# Altium PCB PortSwitcher1D.PCBDOC (part 3 of 4)
Units mil, origin at the board's own origin, x right, y up, seen from the top; angles counter-clockwise.
Board outline 6005.03 x 6005.03 mil, 4 copper layers (Top Layer, InternalPlane1, InternalPlane2, Bottom Layer); 153 components, 325 nets, 1175 pads, 173 vias.
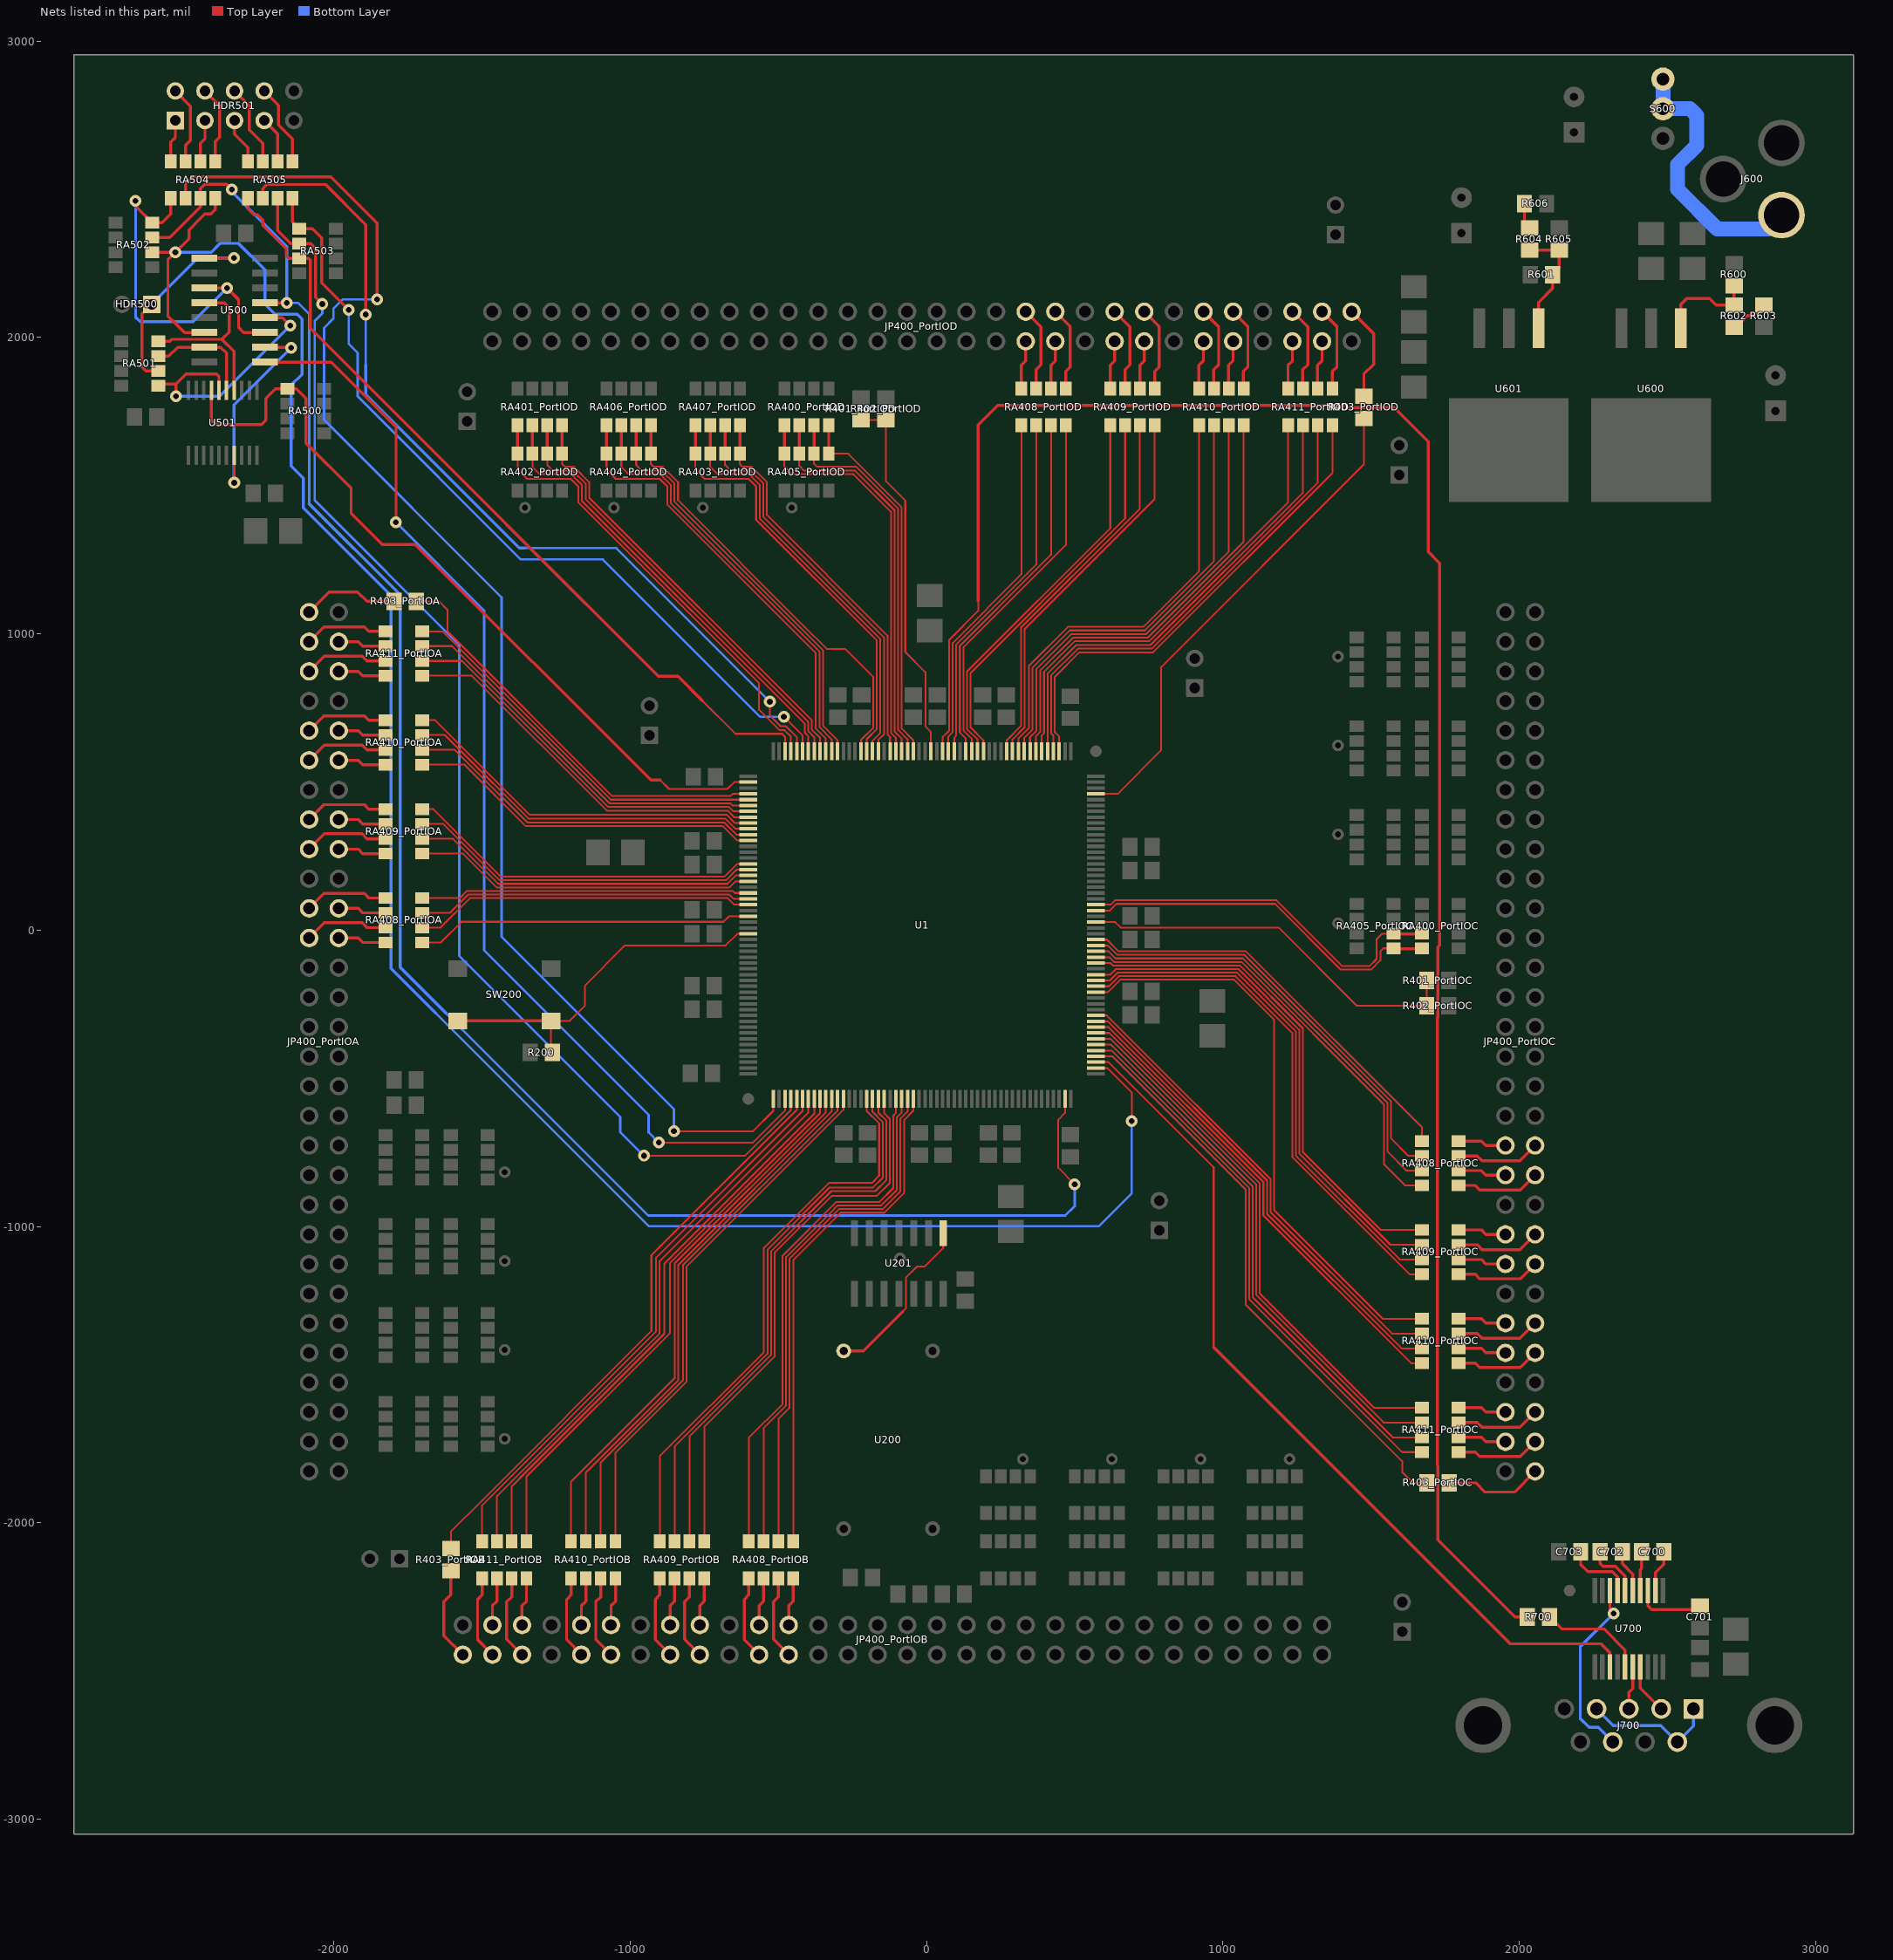
[diagram p5: the nets of this part, all layers, seen from the top]

## Via types
v1: diameter 40, hole 19.68, Top Layer to Bottom Layer, 173 vias

## Nets (pads, with @x,y where several pads share a name; then routed paths per layer and width w, separated by ;. In a path a pad name is that pad's centre, name@x,y a point inside that pad or via, vN(x,y) a via of type N, cw(c..) or ccw(c..) an arc to the next point about the centre after c; other vN are vias at no path point) (continued)
INC14: RA400_PortIOC.7 RA405_PortIOC.6 U1.30 | length 1281.8
  Top Layer w6: U1.30@571.35,86.19 621.14,86.19 635.71,100.77 1180.55,100.77 1401.82,-120.5 1495.13,-120.5 1518.2,-97.43 1518.2,-30.74 1537.53,-11.41 RA405_PortIOC.6@1575.24,-11.41
  Top Layer w10: RA405_PortIOC.6@1574.1,-12.55 RA400_PortIOC.7@1670.1,-12.55
INC15: RA400_PortIOC.8 RA405_PortIOC.5 U1.29 | length 1248.7
  Top Layer w6: U1.29@571.35,66.5 618.42,66.51 640.68,88.77 1175.58,88.77 1397.65,-133.3 1499.3,-133.3 1531,-101.61 1531,-71.09 1540.68,-61.41 RA405_PortIOC.5@1575.24,-61.41
  Top Layer w10: RA405_PortIOC.5@1574.1,-62.55 RA400_PortIOC.8@1670.1,-62.55
INC16: R401_PortIOC.2 R402_PortIOC.1 U1.27 | length 1582.4
  Top Layer w6: U1.27@571.35,27.13 636.49,27.14 654.86,8.77 1187.78,8.77 ; 1374.65,-178.1 1187.78,8.77 ; R401_PortIOC.2@1687.6,-170 R402_PortIOC.1@1687.6,-255 1451.54,-255 1187.78,8.77
IND0: RA401_PortIOD.5 RA402_PortIOD.8 U1.101 | length 1578.3
  Top Layer w6: RA402_PortIOD.8@-1380.26,1607.8 -1380.26,1554.93 -1348.53,1523.2 -1200.63,1523.2 -1175.49,1498.06 -1175.49,1444.01 -565.46,833.98 -565.46,743.67 -496.56,674.77 -479.83,674.77 -458.18,653.12 U1.101@-458.18,603.91
  Top Layer w10: RA402_PortIOD.8@-1380.26,1607.8 RA401_PortIOD.5@-1380.26,1703.8
IND1: RA401_PortIOD.6 RA402_PortIOD.7 U1.98 | length 1547.7
  Top Layer w6: RA402_PortIOD.7@-1330.26,1607.8 -1330.26,1563.99 -1305.04,1538.76 -1199.21,1538.76 -1163.49,1503.04 -1163.49,1448.98 -411.11,696.6 -411.11,666.32 ; -411.11,666.42 -399.12,654.43 U1.98@-399.12,603.91
  Top Layer w10: RA402_PortIOD.7@-1330.26,1607.8 RA401_PortIOD.6@-1330.26,1703.8
IND2: RA401_PortIOD.7 RA402_PortIOD.6 U1.97 | length 1512.1
  Top Layer w6: RA402_PortIOD.6@-1280.26,1607.8 -1280.26,1570.09 -1260.93,1550.76 -1194.24,1550.76 -1150.89,1507.4 -1150.89,1454.09 -399.11,702.32 -399.11,671.42 -379.44,651.75 U1.97@-379.44,603.91
  Top Layer w10: RA402_PortIOD.6@-1280.26,1607.8 RA401_PortIOD.7@-1280.26,1703.8
IND3: RA401_PortIOD.8 RA402_PortIOD.5 U1.96 | length 1478.4
  Top Layer w6: RA402_PortIOD.5@-1230.26,1607.8 -1230.26,1573.24 -1220.58,1563.55 -1190.07,1563.55 -1138.89,1512.37 -1138.89,1459.81 -387.11,708.03 -387.11,676.39 -359.75,649.03 U1.96@-359.75,603.91
  Top Layer w10: RA402_PortIOD.5@-1230.26,1607.8 RA401_PortIOD.8@-1230.26,1703.8
IND4: RA404_PortIOD.8 RA406_PortIOD.5 U1.95 | length 1493.1
  Top Layer w6: RA404_PortIOD.8@-1080.26,1607.8 -1080.26,1554.93 -1048.53,1523.2 -900.63,1523.2 -875.49,1498.06 -875.49,1436.84 -375.11,936.46 -375.11,681.42 -340.07,646.38 U1.95@-340.07,603.91
  Top Layer w10: RA404_PortIOD.8@-1080.26,1607.8 RA406_PortIOD.5@-1080.26,1703.8
IND5: RA404_PortIOD.7 RA406_PortIOD.6 U1.94 | length 1455.9
  Top Layer w6: RA404_PortIOD.7@-1030.26,1607.8 -1030.26,1563.99 -1005.04,1538.76 -899.21,1538.76 -863.49,1503.04 -863.49,1441.82 -361.11,939.43 -361.11,684.42 -320.38,643.69 U1.94@-320.38,603.91
  Top Layer w10: RA404_PortIOD.7@-1030.26,1607.8 RA406_PortIOD.6@-1030.26,1703.8
IND6: RA404_PortIOD.6 RA406_PortIOD.7 U1.93 | length 1420.4
  Top Layer w6: RA404_PortIOD.6@-980.26,1607.8 -980.26,1570.09 -960.93,1550.76 -894.24,1550.76 -850.89,1507.4 -850.89,1446.18 -349.11,944.4 -349.11,689.42 -300.7,641.01 U1.93@-300.7,603.91
  Top Layer w10: RA404_PortIOD.6@-980.26,1607.8 RA406_PortIOD.7@-980.26,1703.8
IND7: RA404_PortIOD.5 RA406_PortIOD.8 U1.89 | length 1482.2
  Top Layer w6: RA404_PortIOD.5@-930.26,1607.8 -930.26,1573.24 -920.58,1563.55 -890.07,1563.55 -838.89,1512.37 -838.89,1451.15 -414.55,1026.82 -337.36,949.62 -275.31,949.62 -180.11,854.42 -180.11,683.4 -221.96,641.55 U1.89@-221.96,603.91
  Top Layer w10: RA404_PortIOD.5@-930.26,1607.8 RA406_PortIOD.8@-930.26,1703.8
IND8: RA403_PortIOD.8 RA407_PortIOD.5 U1.88 | length 1454.2
  Top Layer w6: RA403_PortIOD.8@-780.26,1607.8 -780.26,1554.93 -748.53,1523.2 -600.63,1523.2 -575.49,1498.06 -575.49,1384.61 -168.11,977.22 -168.11,678.43 -202.27,644.26 U1.88@-202.27,603.91
  Top Layer w10: RA403_PortIOD.8@-780.26,1607.8 RA407_PortIOD.5@-780.26,1703.8
IND9: RA403_PortIOD.7 RA407_PortIOD.6 U1.87 | length 1410.7
  Top Layer w6: RA403_PortIOD.7@-730.26,1607.8 -730.26,1563.99 -705.04,1538.76 -599.21,1538.76 -563.49,1503.04 -563.49,1390.09 -156.11,982.7 -156.11,665.51 -182.59,639.03 U1.87@-182.59,603.91
  Top Layer w10: RA403_PortIOD.7@-730.26,1607.8 RA407_PortIOD.6@-730.26,1703.8
IND10: RA403_PortIOD.6 RA407_PortIOD.7 U1.86 | length 1368.8
  Top Layer w6: RA403_PortIOD.6@-680.26,1607.8 -680.26,1570.09 -660.93,1550.76 -594.24,1550.76 -550.89,1507.4 -550.89,1394.45 -144.11,987.67 -144.11,660.54 -162.9,641.74 U1.86@-162.9,603.91
  Top Layer w10: RA403_PortIOD.6@-680.26,1607.8 RA407_PortIOD.7@-680.26,1703.8
IND11: RA403_PortIOD.5 RA407_PortIOD.8 U1.84 | length 1327.7
  Top Layer w6: RA403_PortIOD.5@-630.26,1607.8 -630.26,1573.24 -620.58,1563.55 -590.07,1563.55 -538.89,1512.37 -538.89,1401.15 -132.11,994.37 -132.11,660.54 -123.53,651.96 U1.84@-123.53,603.91
  Top Layer w10: RA403_PortIOD.5@-630.26,1607.8 RA407_PortIOD.8@-630.26,1703.8
IND12: RA400_PortIOD.5 RA405_PortIOD.8 U1.83 | length 1377.2
  Top Layer w6: RA405_PortIOD.8@-480.26,1607.8 -480.26,1564.97 -454.05,1538.76 -246.85,1538.76 -120.11,1412.01 -120.11,665.51 -103.85,649.25 U1.83@-103.85,603.91
  Top Layer w10: RA405_PortIOD.8@-480.26,1607.8 RA400_PortIOD.5@-480.26,1703.8
IND13: RA400_PortIOD.6 RA405_PortIOD.7 U1.82 | length 1344
  Top Layer w6: RA405_PortIOD.7@-430.26,1607.8 -430.26,1567.13 -413.89,1550.76 -241.88,1550.76 -108.11,1416.98 -108.11,670.48 -84.16,646.53 U1.82@-84.16,603.91
  Top Layer w10: RA405_PortIOD.7@-430.26,1607.8 RA400_PortIOD.6@-430.26,1703.8
IND14: RA400_PortIOD.7 RA405_PortIOD.6 U1.81 | length 1308
  Top Layer w6: RA405_PortIOD.6@-380.26,1607.8 -380.26,1574.22 -370.58,1564.54 -238.69,1564.54 -96.11,1421.95 -96.11,675.45 -64.48,643.82 U1.81@-64.48,603.91
  Top Layer w10: RA405_PortIOD.6@-380.26,1607.8 RA400_PortIOD.7@-380.26,1703.8
IND15: RA400_PortIOD.8 RA405_PortIOD.5 U1.80 | length 1256.6
  Top Layer w6: RA405_PortIOD.5@-330.26,1607.8 -264.64,1607.8 -84.11,1427.27 -84.11,680.42 -44.79,641.1 U1.80@-44.79,603.91
  Top Layer w10: RA405_PortIOD.5@-330.26,1607.8 RA400_PortIOD.8@-330.26,1703.8
IND16: R401_PortIOD.2 R402_PortIOD.1 U1.77 | length 1265.5
  Top Layer w6: R401_PortIOD.2@-222.07,1721.73 R402_PortIOD.1@-137.07,1721.73 -137.07,1514.67 -72.11,1449.71 -72.11,938.67 -4.11,870.67 -4.11,687.42 14.26,669.05 U1.77@14.26,603.91
JTAG_NEXUS_TCK: RA503.2 RA505.3 U1.160 | length 4401.5
  Top Layer w6: v1(-954,-761.05) -612.55,-761.05 -458.18,-606.68 U1.160@-458.18,-569.32
  Top Layer w10: RA505.3@-2190.26,2470.29 -2190.26,2361.54 -2146.02,2317.29 -2078.12,2317.29 -2061.98,2301.16 -2061.98,2135.84 v1(-2039.35,2113.21)
  Bottom Layer w8: v1(-2039.35,2113.21) -2039.35,2081.72 -2064.94,2056.14 -2064.94,1450.98 -1576.87,962.92 -1576.87,-87.01 -1033.7,-630.18 -1033.7,-681.35 v1(-954,-761.05)
JTAG_NEXUS_TDI: RA503.3 RA505.1 U1.102 | length 2793.5
  Top Layer w6: -757.2,774.97 -645,662.77 -568.25,662.77 -487.52,662.77 -477.86,653.12 U1.102@-477.86,603.91
  Top Layer w10: RA505.1@-2290.26,2470.29 -2290.26,2434.91 -2269.1,2413.75 -2257.3,2413.75 -2240.26,2396.72 -2240.26,2379.07 -2161.28,2300.08 -2161.28,2276.47 -2152.1,2267.29 -2086.18,2267.29 -2079.7,2260.81 -2079.7,2031.54 -1450.79,1402.63 -1385.85,1337.7 -904.8,856.64 -838.87,856.64 -757.2,774.97
JTAG_NEXUS_TDO: RA505.2 U1.100 | length 3023.3
  Top Layer w6: v1(-529.04,771.23) -529.04,724.97 -492.63,688.55 -474.91,688.55 -438.49,652.13 U1.100@-438.49,603.91
  Top Layer w10: RA505.2@-2240.26,2470.29 -2240.26,2503.18 -2226.79,2516.65 -2028.53,2516.65 -1892.74,2380.86 v1(-1892.74,2077.79)
  Bottom Layer w8: -1892.74,1907.56 v1(-1892.74,2077.79) ; -1355.47,1289.6 -1047.42,1289.6 v1(-529.04,771.23)
  Bottom Layer w10: -1892.74,1907.56 -1892.74,1808.17 -1374.17,1289.6 -1355.47,1289.6
JTAG_NEXUS_TMS: RA503.1 RA505.4 U1.99 | length 2814.2
  Top Layer w6: v1(-481.8,720.05) -419.77,658.02 -419.77,657.12 ; U1.99@-418.81,603.91 -418.81,657.12
  Top Layer w10: RA505.4@-2140.26,2470.29 -2140.26,2390.29 RA503.1@-2117.26,2367.29 -2072.03,2367.29 -2041.32,2336.58 -2041.32,2185.04 v1(-1949.81,2093.53)
  Bottom Layer w8: v1(-1949.81,2093.53) -1949.81,1978.4 -1919.98,1948.58 -1919.98,1801.96 -1369.25,1251.23 -1092.74,1251.23 -561.56,720.05 v1(-481.8,720.05)
NetC700_1: C700.1 U700.2 | length 142.6
  Top Layer w10: U700.2@2459.3,-2228.77 2459.3,-2167.38 2487.14,-2139.55 C700.1@2487.14,-2097.71
NetC700_2: C700.2 U700.4 | length 132.8
  Top Layer w10: U700.4@2408.12,-2228.77 2408.12,-2158.54 2412.33,-2154.33 C700.2@2412.33,-2097.71
NetC701_2: C701.2 U700.3 | length 236.7
  Top Layer w10: U700.3@2433.71,-2228.77 2433.71,-2279.16 2446.7,-2292.16 2597.89,-2292.16 C701.2@2609.74,-2280.31
NetC702_1: C702.1 U700.5 | length 145.7
  Top Layer w10: C702.1@2347.14,-2097.71 2347.14,-2137.49 2382.53,-2172.88 U700.5@2382.53,-2228.77
NetC702_2: C702.2 U700.6 | length 190.9
  Top Layer w10: C702.2@2272.33,-2097.71 2272.33,-2137.47 2282.38,-2147.51 2324.69,-2147.51 2356.94,-2179.76 U700.6@2356.94,-2228.77
NetC703_1: C703.1 U700.7 | length 230.9
  Top Layer w10: C703.1@2207.14,-2097.71 2207.14,-2141.15 2231.21,-2165.22 2313.86,-2165.22 2331.35,-2182.71 U700.7@2331.35,-2228.77
NetHDR500_1: HDR500.1 RA501.2 U500.1 | length 727.9
  Top Layer w10: HDR500.1@-2615.26,2112.29 -2647.46,2080.09 -2647.46,1900.67 -2634.09,1887.29 RA501.2@-2593.26,1887.29 ; U500.1@-2437.63,2267.29 -2338.9,2267.29 v1(-2337.5,2268.68)
  Bottom Layer w10: HDR500.1@-2615.26,2112.29 -2458.87,2268.68 v1(-2337.5,2268.68)
NetJ700_1: J700.1 J700.4 J700.6 | length 453.3
  Bottom Layer w10: J700.4@2260.68,-2627.79 2316.68,-2683.79 2477.51,-2683.79 J700.6@2533.32,-2739.6 2587.85,-2685.07 J700.1@2587.85,-2627.79
NetR600_1: R600.1 R602.2 U600.1 | length 342.3
  Top Layer w10: U600.1@2544.74,2032.29 2544.74,2111.86 2564.78,2131.91 2641.54,2131.91 2663.75,2109.69 R602.2@2724.74,2109.69 R600.1@2724.74,2174.89
NetR601_1: R601.1 R604.2 R605.2 U601.1 | length 391.6
  Top Layer w10: R604.2@2034.74,2294.89 R605.2@2134.74,2294.89 2134.74,2234.89 R601.1@2112.14,2212.29 2112.14,2166.34 2064.74,2118.94 U601.1@2064.74,2032.29
NetR602_1: R602.1 R603.2 | length 131
  Top Layer w10: R602.1@2724.74,2034.89 2729.51,2034.89 2769.46,2074.84 2789.88,2074.84 R603.2@2824.74,2109.69
NetR604_1: R604.1 R606.2 | length 89.8
  Top Layer w10: R606.2@2017.33,2452.29 2017.33,2387.1 R604.1@2034.74,2369.69
NetR700_1: R700.1 U700.15 | length 358.4
  Top Layer w10: R700.1@2102.14,-2317.71 2142.51,-2358.08 2285.83,-2358.08 2356.94,-2429.19 U700.15@2356.94,-2486.65
NetRA501_1: RA501.1 U500.12 U501.6 | length 893.6
  Top Layer w10: RA501.1@-2593.26,1837.29 -2587.76,1842.79 -2533.32,1842.79 ; v1(-2533.32,1802.27) -2533.32,1842.79 ; U501.6@-2388.06,1821.54 -2388.06,1868.57 -2396.54,1877.05 -2499.06,1877.05 -2533.32,1842.79 ; U500.12@-2232.9,2067.29 -2174.49,2067.29 v1(-2147.59,2040.4)
  Bottom Layer w10: v1(-2533.32,1802.27) -2385.72,1802.27 v1(-2147.59,2040.4)
NetRA501_3: RA501.3 U500.7 U501.5 | length 377.2
  Top Layer w10: RA501.3@-2593.26,1937.29 -2557.7,1937.29 -2527.7,1967.29 -2382.48,1967.29 -2362.47,1947.28 U501.5@-2362.47,1821.54
NetRA501_4: RA501.4 U500.4 U501.4 | length 615.7
  Top Layer w10: RA501.4@-2593.26,1987.29 -2553.98,1987.29 -2547.13,1994.15 -2377.85,1994.15 ; U500.4@-2437.63,2117.29 -2370.12,2117.29 -2353.25,2100.42 -2353.25,2018.75 -2377.85,1994.15 ; U501.4@-2336.88,1821.54 -2336.88,1953.18 -2377.85,1994.15
NetU200_8: U200.8 U201.1 | length 591.3
  Top Layer w6: -81.1,-1287.72 -70.38,-1277 -70.38,-1172.67 -32.98,-1135.27 -7,-1135.27 56,-1072.28 U201.1@56,-1022.08
  Top Layer w10: U200.8@-280,-1420 -213.38,-1420 -81.1,-1287.72
O0_PortIOA: JP400_PortIOA.38 RA408_PortIOA.4 | length 164.2
  Top Layer w10: JP400_PortIOA.38@-1983.77,-26.41 -1918.02,-26.41 -1903.02,-41.41 RA408_PortIOA.4@-1825.77,-41.41
O0_PortIOB: JP400_PortIOB.38 RA408_PortIOB.4 | length 164.2
  Top Layer w10: JP400_PortIOB.38@-465.26,-2344.91 -465.26,-2279.17 -450.26,-2264.17 RA408_PortIOB.4@-450.26,-2186.91
O0_PortIOC: JP400_PortIOC.38 RA408_PortIOC.4 | length 164.2
  Top Layer w10: RA408_PortIOC.4@1795.24,-711.41 1872.49,-711.41 1887.49,-726.41 JP400_PortIOC.38@1953.24,-726.41
O0_PortIOD: JP400_PortIOD.38 RA408_PortIOD.4 | length 164.2
  Top Layer w10: RA408_PortIOD.4@319.34,1829.37 319.34,1906.62 334.34,1921.62 JP400_PortIOD.38@334.34,1987.37
O1_PortIOA: JP400_PortIOA.37 RA408_PortIOA.3 | length 286.2
  Top Layer w10: JP400_PortIOA.37@-2083.77,-26.41 -2032.19,25.17 -1905.03,25.17 -1888.45,8.59 RA408_PortIOA.3@-1825.77,8.59
O1_PortIOB: JP400_PortIOB.37 RA408_PortIOB.3 | length 286.2
  Top Layer w10: RA408_PortIOB.3@-500.26,-2186.91 -500.26,-2249.6 -516.84,-2266.17 -516.84,-2393.34 JP400_PortIOB.37@-465.26,-2444.91
O1_PortIOC: JP400_PortIOC.37 RA408_PortIOC.3 | length 286.2
  Top Layer w10: RA408_PortIOC.3@1795.24,-761.41 1857.93,-761.41 1874.5,-777.98 2001.66,-777.98 JP400_PortIOC.37@2053.24,-726.41
O1_PortIOD: JP400_PortIOD.37 RA408_PortIOD.3 | length 286.2
  Top Layer w10: JP400_PortIOD.37@334.34,2087.37 385.92,2035.8 385.92,1908.63 369.34,1892.06 RA408_PortIOD.3@369.34,1829.37
O2_PortIOA: JP400_PortIOA.40 RA408_PortIOA.2 | length 164.2
  Top Layer w10: JP400_PortIOA.40@-1983.77,73.59 -1918.02,73.59 -1903.02,58.59 RA408_PortIOA.2@-1825.77,58.59
O2_PortIOB: JP400_PortIOB.40 RA408_PortIOB.2 | length 164.2
  Top Layer w10: JP400_PortIOB.40@-565.26,-2344.91 -565.26,-2279.17 -550.26,-2264.17 RA408_PortIOB.2@-550.26,-2186.91
O2_PortIOC: JP400_PortIOC.40 RA408_PortIOC.2 | length 164.2
  Top Layer w10: RA408_PortIOC.2@1795.24,-811.41 1872.49,-811.41 1887.49,-826.41 JP400_PortIOC.40@1953.24,-826.41
O2_PortIOD: JP400_PortIOD.40 RA408_PortIOD.2 | length 164.2
  Top Layer w10: RA408_PortIOD.2@419.34,1829.37 419.34,1906.62 434.34,1921.62 JP400_PortIOD.40@434.34,1987.37
O3_PortIOA: JP400_PortIOA.39 RA408_PortIOA.1 | length 284.9
  Top Layer w10: JP400_PortIOA.39@-2083.77,73.59 -2033.77,123.59 -1897.16,123.59 -1882.16,108.59 RA408_PortIOA.1@-1825.77,108.59
O3_PortIOB: JP400_PortIOB.39 RA408_PortIOB.1 | length 284.9
  Top Layer w10: RA408_PortIOB.1@-600.26,-2186.91 -600.26,-2243.3 -615.26,-2258.3 -615.26,-2394.91 JP400_PortIOB.39@-565.26,-2444.91
O3_PortIOC: JP400_PortIOC.39 RA408_PortIOC.1 | length 284.9
  Top Layer w10: RA408_PortIOC.1@1795.24,-861.41 1851.63,-861.41 1866.63,-876.41 2003.24,-876.41 JP400_PortIOC.39@2053.24,-826.41
O3_PortIOD: JP400_PortIOD.39 RA408_PortIOD.1 | length 284.9
  Top Layer w10: JP400_PortIOD.39@434.34,2087.37 484.34,2037.37 484.34,1900.76 469.34,1885.76 RA408_PortIOD.1@469.34,1829.37
O4_PortIOA: JP400_PortIOA.44 RA409_PortIOA.4 | length 164.2
  Top Layer w10: JP400_PortIOA.44@-1983.77,273.59 -1918.02,273.59 -1903.02,258.59 RA409_PortIOA.4@-1825.77,258.59
O4_PortIOB: JP400_PortIOB.44 RA409_PortIOB.4 | length 164.2
  Top Layer w10: JP400_PortIOB.44@-765.26,-2344.91 -765.26,-2279.17 -750.26,-2264.17 RA409_PortIOB.4@-750.26,-2186.91
O4_PortIOC: JP400_PortIOC.44 RA409_PortIOC.4 | length 164.2
  Top Layer w10: RA409_PortIOC.4@1795.24,-1011.41 1872.49,-1011.41 1887.49,-1026.41 JP400_PortIOC.44@1953.24,-1026.41
O4_PortIOD: JP400_PortIOD.44 RA409_PortIOD.4 | length 164.2
  Top Layer w10: RA409_PortIOD.4@619.34,1829.37 619.34,1906.62 634.34,1921.62 JP400_PortIOD.44@634.34,1987.37
O5_PortIOA: JP400_PortIOA.43 RA409_PortIOA.3 | length 286.2
  Top Layer w10: JP400_PortIOA.43@-2083.77,273.59 -2032.19,325.17 -1905.03,325.17 -1888.45,308.59 RA409_PortIOA.3@-1825.77,308.59
O5_PortIOB: JP400_PortIOB.43 RA409_PortIOB.3 | length 286.2
  Top Layer w10: RA409_PortIOB.3@-800.26,-2186.91 -800.26,-2249.6 -816.84,-2266.17 -816.84,-2393.34 JP400_PortIOB.43@-765.26,-2444.91
O5_PortIOC: JP400_PortIOC.43 RA409_PortIOC.3 | length 286.2
  Top Layer w10: RA409_PortIOC.3@1795.24,-1061.41 1857.93,-1061.41 1874.5,-1077.98 2001.66,-1077.98 JP400_PortIOC.43@2053.24,-1026.41
O5_PortIOD: JP400_PortIOD.43 RA409_PortIOD.3 | length 286.2
  Top Layer w10: JP400_PortIOD.43@634.34,2087.37 685.92,2035.8 685.92,1908.63 669.34,1892.06 RA409_PortIOD.3@669.34,1829.37
O6_PortIOA: JP400_PortIOA.46 RA409_PortIOA.2 | length 164.2
  Top Layer w10: JP400_PortIOA.46@-1983.77,373.59 -1918.02,373.59 -1903.02,358.59 RA409_PortIOA.2@-1825.77,358.59
O6_PortIOB: JP400_PortIOB.46 RA409_PortIOB.2 | length 164.2
  Top Layer w10: JP400_PortIOB.46@-865.26,-2344.91 -865.26,-2279.17 -850.26,-2264.17 RA409_PortIOB.2@-850.26,-2186.91
O6_PortIOC: JP400_PortIOC.46 RA409_PortIOC.2 | length 164.2
  Top Layer w10: RA409_PortIOC.2@1795.24,-1111.41 1872.49,-1111.41 1887.49,-1126.41 JP400_PortIOC.46@1953.24,-1126.41
O6_PortIOD: JP400_PortIOD.46 RA409_PortIOD.2 | length 164.2
  Top Layer w10: RA409_PortIOD.2@719.34,1829.37 719.34,1906.62 734.34,1921.62 JP400_PortIOD.46@734.34,1987.37
O7_PortIOA: JP400_PortIOA.45 RA409_PortIOA.1 | length 284.9
  Top Layer w10: JP400_PortIOA.45@-2083.77,373.59 -2033.77,423.59 -1897.16,423.59 -1882.16,408.59 RA409_PortIOA.1@-1825.77,408.59
O7_PortIOB: JP400_PortIOB.45 RA409_PortIOB.1 | length 284.9
  Top Layer w10: RA409_PortIOB.1@-900.26,-2186.91 -900.26,-2243.3 -915.26,-2258.3 -915.26,-2394.91 JP400_PortIOB.45@-865.26,-2444.91
O7_PortIOC: JP400_PortIOC.45 RA409_PortIOC.1 | length 284.9
  Top Layer w10: RA409_PortIOC.1@1795.24,-1161.41 1851.63,-1161.41 1866.63,-1176.41 2003.24,-1176.41 JP400_PortIOC.45@2053.24,-1126.41
O7_PortIOD: JP400_PortIOD.45 RA409_PortIOD.1 | length 284.9
  Top Layer w10: JP400_PortIOD.45@734.34,2087.37 784.34,2037.37 784.34,1900.76 769.34,1885.76 RA409_PortIOD.1@769.34,1829.37
O8_PortIOA: JP400_PortIOA.50 RA410_PortIOA.4 | length 164.2
  Top Layer w10: JP400_PortIOA.50@-1983.77,573.2 -1918.02,573.2 -1903.02,558.2 RA410_PortIOA.4@-1825.77,558.2
O8_PortIOB: JP400_PortIOB.50 RA410_PortIOB.4 | length 164.2
  Top Layer w10: JP400_PortIOB.50@-1064.87,-2344.91 -1064.87,-2279.16 -1049.87,-2264.16 RA410_PortIOB.4@-1049.87,-2186.91
O8_PortIOC: JP400_PortIOC.50 RA410_PortIOC.4 | length 164.2
  Top Layer w10: RA410_PortIOC.4@1795.24,-1311.02 1872.49,-1311.02 1887.49,-1326.02 JP400_PortIOC.50@1953.24,-1326.02
O8_PortIOD: JP400_PortIOD.50 RA410_PortIOD.4 | length 164.2
  Top Layer w10: RA410_PortIOD.4@918.95,1829.37 918.95,1906.62 933.95,1921.62 JP400_PortIOD.50@933.95,1987.37
O9_PortIOA: JP400_PortIOA.49 RA410_PortIOA.3 | length 286.2
  Top Layer w10: JP400_PortIOA.49@-2083.77,573.2 -2032.19,624.77 -1905.03,624.77 -1888.45,608.2 RA410_PortIOA.3@-1825.77,608.2
O9_PortIOB: JP400_PortIOB.49 RA410_PortIOB.3 | length 286.2
  Top Layer w10: RA410_PortIOB.3@-1099.87,-2186.91 -1099.87,-2249.6 -1116.45,-2266.17 -1116.45,-2393.34 JP400_PortIOB.49@-1064.87,-2444.91
O9_PortIOC: JP400_PortIOC.49 RA410_PortIOC.3 | length 286.2
  Top Layer w10: RA410_PortIOC.3@1795.24,-1361.02 1857.92,-1361.02 ; 1857.92,-1361.02 1874.5,-1377.59 2001.66,-1377.59 JP400_PortIOC.49@2053.24,-1326.02
O9_PortIOD: JP400_PortIOD.49 RA410_PortIOD.3 | length 286.2
  Top Layer w10: JP400_PortIOD.49@933.95,2087.37 985.52,2035.8 985.52,1908.63 968.95,1892.06 RA410_PortIOD.3@968.95,1829.37
O10_PortIOA: JP400_PortIOA.52 RA410_PortIOA.2 | length 164.2
  Top Layer w10: JP400_PortIOA.52@-1983.77,673.2 -1918.02,673.2 -1903.02,658.2 RA410_PortIOA.2@-1825.77,658.2
O10_PortIOB: JP400_PortIOB.52 RA410_PortIOB.2 | length 164.2
  Top Layer w10: JP400_PortIOB.52@-1164.87,-2344.91 -1164.87,-2279.16 -1149.87,-2264.16 RA410_PortIOB.2@-1149.87,-2186.91
O10_PortIOC: JP400_PortIOC.52 RA410_PortIOC.2 | length 164.2
  Top Layer w10: RA410_PortIOC.2@1795.24,-1411.02 1872.49,-1411.02 1887.49,-1426.02 JP400_PortIOC.52@1953.24,-1426.02
O10_PortIOD: JP400_PortIOD.52 RA410_PortIOD.2 | length 164.2
  Top Layer w10: RA410_PortIOD.2@1018.95,1829.37 1018.95,1906.62 1033.95,1921.62 JP400_PortIOD.52@1033.95,1987.37
O11_PortIOA: JP400_PortIOA.51 RA410_PortIOA.1 | length 284.9
  Top Layer w10: JP400_PortIOA.51@-2083.77,673.2 -2033.77,723.2 -1897.15,723.2 -1882.16,708.2 RA410_PortIOA.1@-1825.77,708.2
O11_PortIOB: JP400_PortIOB.51 RA410_PortIOB.1 | length 284.9
  Top Layer w10: RA410_PortIOB.1@-1199.87,-2186.91 -1199.87,-2243.3 -1214.87,-2258.3 -1214.87,-2394.91 JP400_PortIOB.51@-1164.87,-2444.91
O11_PortIOC: JP400_PortIOC.51 RA410_PortIOC.1 | length 284.9
  Top Layer w10: RA410_PortIOC.1@1795.24,-1461.02 1851.63,-1461.02 1866.62,-1476.01 2003.24,-1476.01 JP400_PortIOC.51@2053.24,-1426.02
O11_PortIOD: JP400_PortIOD.51 RA410_PortIOD.1 | length 284.9
  Top Layer w10: JP400_PortIOD.51@1033.95,2087.37 1083.95,2037.37 1083.95,1900.76 1068.95,1885.76 RA410_PortIOD.1@1068.95,1829.37
O12_PortIOA: JP400_PortIOA.56 RA411_PortIOA.4 | length 164.2
  Top Layer w10: JP400_PortIOA.56@-1983.77,873.59 -1918.02,873.59 -1903.02,858.59 RA411_PortIOA.4@-1825.77,858.59
O12_PortIOB: JP400_PortIOB.56 RA411_PortIOB.4 | length 164.2
  Top Layer w10: JP400_PortIOB.56@-1365.26,-2344.91 -1365.26,-2279.17 -1350.26,-2264.17 RA411_PortIOB.4@-1350.26,-2186.91
O12_PortIOC: JP400_PortIOC.56 RA411_PortIOC.4 | length 164.2
  Top Layer w10: RA411_PortIOC.4@1795.24,-1611.41 1872.49,-1611.41 1887.49,-1626.41 JP400_PortIOC.56@1953.24,-1626.41
O12_PortIOD: JP400_PortIOD.56 RA411_PortIOD.4 | length 164.2
  Top Layer w10: RA411_PortIOD.4@1219.34,1829.37 1219.34,1906.62 1234.34,1921.62 JP400_PortIOD.56@1234.34,1987.37
O13_PortIOA: JP400_PortIOA.55 RA411_PortIOA.3 | length 286.2
  Top Layer w10: JP400_PortIOA.55@-2083.77,873.59 -2032.19,925.17 -1905.03,925.17 -1888.45,908.59 RA411_PortIOA.3@-1825.77,908.59
O13_PortIOB: JP400_PortIOB.55 RA411_PortIOB.3 | length 286.2
  Top Layer w10: RA411_PortIOB.3@-1400.26,-2186.91 -1400.26,-2249.6 -1416.84,-2266.17 -1416.84,-2393.34 JP400_PortIOB.55@-1365.26,-2444.91
O13_PortIOC: JP400_PortIOC.55 RA411_PortIOC.3 | length 286.2
  Top Layer w10: RA411_PortIOC.3@1795.24,-1661.41 1857.93,-1661.41 1874.5,-1677.98 2001.66,-1677.98 JP400_PortIOC.55@2053.24,-1626.41
O13_PortIOD: JP400_PortIOD.55 RA411_PortIOD.3 | length 286.2
  Top Layer w10: JP400_PortIOD.55@1234.34,2087.37 1285.92,2035.8 1285.92,1908.63 1269.34,1892.06 RA411_PortIOD.3@1269.34,1829.37
O14_PortIOA: JP400_PortIOA.58 RA411_PortIOA.2 | length 164.2
  Top Layer w10: JP400_PortIOA.58@-1983.77,973.59 -1918.02,973.59 -1903.02,958.59 RA411_PortIOA.2@-1825.77,958.59
O14_PortIOB: JP400_PortIOB.58 RA411_PortIOB.2 | length 164.2
  Top Layer w10: JP400_PortIOB.58@-1465.26,-2344.91 -1465.26,-2279.17 -1450.26,-2264.17 RA411_PortIOB.2@-1450.26,-2186.91
O14_PortIOC: JP400_PortIOC.58 RA411_PortIOC.2 | length 164.2
  Top Layer w10: RA411_PortIOC.2@1795.24,-1711.41 1872.49,-1711.41 1887.49,-1726.41 JP400_PortIOC.58@1953.24,-1726.41
O14_PortIOD: JP400_PortIOD.58 RA411_PortIOD.2 | length 164.2
  Top Layer w10: RA411_PortIOD.2@1319.34,1829.37 1319.34,1906.62 1334.34,1921.62 JP400_PortIOD.58@1334.34,1987.37
O15_PortIOA: JP400_PortIOA.57 RA411_PortIOA.1 | length 284.9
  Top Layer w10: JP400_PortIOA.57@-2083.77,973.59 -2033.77,1023.59 -1897.16,1023.59 -1882.16,1008.59 RA411_PortIOA.1@-1825.77,1008.59
O15_PortIOB: JP400_PortIOB.57 RA411_PortIOB.1 | length 284.9
  Top Layer w10: RA411_PortIOB.1@-1500.26,-2186.91 -1500.26,-2243.3 -1515.26,-2258.3 -1515.26,-2394.91 JP400_PortIOB.57@-1465.26,-2444.91
O15_PortIOC: JP400_PortIOC.57 RA411_PortIOC.1 | length 284.9
  Top Layer w10: RA411_PortIOC.1@1795.24,-1761.41 1851.63,-1761.41 1866.63,-1776.41 2003.24,-1776.41 JP400_PortIOC.57@2053.24,-1726.41
O15_PortIOD: JP400_PortIOD.57 RA411_PortIOD.1 | length 284.9
  Top Layer w10: JP400_PortIOD.57@1334.34,2087.37 1384.34,2037.37 1384.34,1900.76 1369.34,1885.76 RA411_PortIOD.1@1369.34,1829.37
O16_PortIOA: JP400_PortIOA.59 R403_PortIOA.2 | length 328.1
  Top Layer w10: JP400_PortIOA.59@-2083.77,1073.59 -2015.92,1141.44 -1920.77,1141.44 -1889.01,1109.68 R403_PortIOA.2@-1796.95,1109.68
O16_PortIOB: JP400_PortIOB.59 R403_PortIOB.2 | length 319.6
  Top Layer w10: R403_PortIOB.2@-1605.5,-2161.9 -1605.5,-2242.15 -1629.5,-2266.15 -1629.5,-2380.67 JP400_PortIOB.59@-1565.26,-2444.91
O16_PortIOC: JP400_PortIOC.59 R403_PortIOC.2 | length 332.2
  Top Layer w10: R403_PortIOC.2@1762.83,-1865 1853.19,-1865 1884.36,-1896.17 1983.48,-1896.17 JP400_PortIOC.59@2053.24,-1826.41
O16_PortIOD: JP400_PortIOD.59 R403_PortIOD.2 | length 329.8
  Top Layer w10: JP400_PortIOD.59@1434.34,2087.37 1508.47,2013.24 1508.47,1909.94 1475.5,1876.97 R403_PortIOD.2@1475.5,1801.9
OUTA0: RA408_PortIOA.5 U1.129 | length 1136.4
  Top Layer w6: RA408_PortIOA.5@-1701.77,-41.41 -1639.34,-41.41 -1569.48,28.45 -685.39,28.45 -667.02,46.82 U1.129@-601.88,46.82
OUTA1: RA408_PortIOA.6 U1.127 | length 1150.5
  Top Layer w6: RA408_PortIOA.6@-1701.77,8.59 -1641.44,8.59 -1541.59,108.45 -671.21,108.45 -648.95,86.19 U1.127@-601.88,86.19
OUTA2: RA408_PortIOA.7 U1.126 | length 1131.5
  Top Layer w6: RA408_PortIOA.7@-1701.77,58.59 -1608.41,58.59 -1546.56,120.45 -666.24,120.45 -651.66,105.88 U1.126@-601.88,105.87
OUTA3: RA408_PortIOA.8 U1.125 | length 1112.6
  Top Layer w6: RA408_PortIOA.8@-1701.77,108.59 -1575.38,108.59 -1551.53,132.45 -654.39,132.45 -647.5,125.56 U1.125@-601.88,125.56
OUTA4: RA409_PortIOA.5 U1.123 | length 1155.7
  Top Layer w6: RA409_PortIOA.5@-1701.77,258.59 -1565.03,258.59 -1450.89,144.45 -665.39,144.45 -644.91,164.93 U1.123@-601.88,164.93
OUTA5: RA409_PortIOA.6 U1.122 | length 1174.6
  Top Layer w6: RA409_PortIOA.6@-1701.77,308.59 -1598.06,308.59 -1548.06,258.59 -1445.92,156.45 -672.52,156.45 -644.35,184.61 U1.122@-601.88,184.61
OUTA6: RA409_PortIOA.7 U1.121 | length 1193.5
  Top Layer w6: RA409_PortIOA.7@-1701.77,358.59 -1631.09,358.59 -1581.09,308.59 -1440.94,168.45 -677.52,168.45 -641.67,204.3 U1.121@-601.88,204.3
OUTA7: RA409_PortIOA.8 U1.120 | length 1212.4
  Top Layer w6: RA409_PortIOA.8@-1701.77,408.59 -1664.12,408.59 -1614.12,358.59 -1435.97,180.45 -682.52,180.45 -638.98,223.98 U1.120@-601.88,223.98
OUTA8: RA410_PortIOA.5 U1.116 | length 1205.9
  Top Layer w6: RA410_PortIOA.5@-1701.77,558.59 -1559.5,558.59 -1352.04,351.13 -687.39,351.13 -638.98,302.73 U1.116@-601.88,302.73
OUTA9: RA410_PortIOA.6 U1.115 | length 1218.4
  Top Layer w6: RA410_PortIOA.6@-1701.77,608.59 -1592.53,608.59 -1542.53,558.59 -1347.07,363.13 -682.39,363.13 -641.67,322.41 U1.115@-601.88,322.41
OUTA10: RA410_PortIOA.7 U1.114 | length 1231
  Top Layer w6: RA410_PortIOA.7@-1701.77,658.59 -1625.56,658.59 -1575.56,608.59 -1344.1,377.13 -679.39,377.13 -644.35,342.1 U1.114@-601.88,342.1
OUTA11: RA410_PortIOA.8 U1.113 | length 1243.5
  Top Layer w6: RA410_PortIOA.8@-1701.77,708.59 -1658.59,708.59 -1608.59,658.59 -1339.13,389.13 -674.39,389.13 -647.04,361.78 U1.113@-601.88,361.78
OUTA12: RA411_PortIOA.5 U1.112 | length 1297.5
  Top Layer w6: RA411_PortIOA.5@-1701.77,858.59 -1534.78,858.59 -1079.32,403.13 -671.39,403.13 -649.72,381.47 U1.112@-601.88,381.47
OUTA13: RA411_PortIOA.6 U1.111 | length 1310.1
  Top Layer w6: RA411_PortIOA.6@-1701.77,908.59 -1567.81,908.59 -1075.74,416.52 -667.78,416.52 -652.41,401.15 U1.111@-601.88,401.15
OUTA14: RA411_PortIOA.7 U1.110 | length 1322.6
  Top Layer w6: RA411_PortIOA.7@-1701.77,958.59 -1600.84,958.59 -1070.77,428.52 -662.78,428.52 -655.09,420.84 U1.110@-601.88,420.84
OUTA15: RA411_PortIOA.8 U1.109 | length 1335.2
  Top Layer w6: RA411_PortIOA.8@-1701.77,1008.59 -1633.87,1008.59 -1065.8,440.52 U1.109@-601.88,440.52
OUTA16: R403_PortIOA.1 U1.108 | length 1437.9
  Top Layer w6: R403_PortIOA.1@-1722.15,1109.68 -1645.96,1109.68 -1616.9,1080.62 -1616.9,1008.59 -1060.83,452.52 -662.06,452.52 -654.38,460.21 U1.108@-601.88,460.21
OUTB0: RA408_PortIOB.5 U1.181 | length 1748.2
  Top Layer w6: RA408_PortIOB.5@-450.26,-2062.91 -450.26,-1113.31 -303.65,-966.69 -290.33,-953.37 -142.42,-953.37 -76.42,-887.37 -76.42,-640.86 -44.79,-609.23 U1.181@-44.79,-569.32
OUTB1: RA408_PortIOB.6 U1.180 | length 1760.3
  Top Layer w6: RA408_PortIOB.6@-500.26,-2062.91 -500.26,-1649.8 -462.26,-1611.8 -462.26,-1108.34 -316.26,-962.33 -295.3,-941.37 -148.14,-941.37 -88.42,-881.65 -88.42,-635.89 -64.48,-611.95 U1.180@-64.48,-569.32
OUTB2: RA408_PortIOB.7 U1.179 | length 1772.4
  Top Layer w6: RA408_PortIOB.7@-550.26,-2062.91 -550.26,-1680.35 -474.26,-1604.35 -474.26,-1103.36 -328.26,-957.36 -299.66,-928.76 -153.25,-928.76 -100.42,-875.94 -100.42,-630.92 -84.16,-614.66 U1.179@-84.16,-569.32
OUTB3: RA408_PortIOB.8 U1.178 | length 1784.5
  Top Layer w6: RA408_PortIOB.8@-600.26,-2062.91 -600.26,-1713.38 -486.26,-1599.38 -486.26,-1098.39 -304.63,-916.76 -158.97,-916.76 -112.42,-870.22 -112.42,-857.42 -112.42,-625.95 -103.85,-617.38 U1.178@-103.85,-569.32
OUTB4: RA409_PortIOB.5 U1.176 | length 1849.7
  Top Layer w6: RA409_PortIOB.5@-750.26,-2062.91 -750.26,-1675.86 -513.11,-1438.7 -513.11,-1089.29 -319.91,-896.09 -167.82,-896.09 -124.42,-852.69 -124.42,-636.92 -143.22,-618.13 U1.176@-143.22,-569.32
OUTB5: RA409_PortIOB.6 U1.175 | length 1866.6
  Top Layer w6: RA409_PortIOB.6@-800.26,-2062.91 -800.26,-1708.89 -750.26,-1658.89 -525.11,-1433.73 -525.11,-1084.02 -321.62,-880.53 -172.93,-880.53 -136.42,-844.02 -136.42,-641.89 -162.9,-615.41 U1.175@-162.9,-569.32
OUTB6: RA409_PortIOB.7 U1.174 | length 1884.4
  Top Layer w6: RA409_PortIOB.7@-850.26,-2062.91 -850.26,-1741.92 -800.26,-1691.92 -537.11,-1428.76 -537.11,-1078.31 -327.33,-868.53 -180.62,-868.53 -148.42,-836.34 -148.42,-646.86 -182.59,-612.7 U1.174@-182.59,-569.32
OUTB7: RA409_PortIOB.8 U1.173 | length 1902.2
  Top Layer w6: RA409_PortIOB.8@-900.26,-2062.91 -900.26,-1774.95 -559.37,-1434.05 -549.11,-1423.79 -549.11,-1072.6 -329.3,-852.79 -184.56,-852.79 -160.42,-828.65 -160.42,-651.83 -202.27,-609.98 U1.173@-202.27,-569.32
OUTB8: RA410_PortIOB.5 U1.169 | length 1812.2
  Top Layer w6: RA410_PortIOB.5@-1050.26,-2062.91 -1050.26,-1764.25 -810.35,-1524.33 -810.35,-1135.76 -281.01,-606.43 U1.169@-281.01,-569.32
OUTB9: RA410_PortIOB.6 U1.168 | length 1824.8
  Top Layer w6: RA410_PortIOB.6@-1100.26,-2062.91 -1100.26,-1797.28 -822.35,-1519.36 -822.35,-1130.76 -300.7,-609.11 U1.168@-300.7,-569.32
OUTB10: RA410_PortIOB.7 U1.167 | length 1837.3
  Top Layer w6: RA410_PortIOB.7@-1150.26,-2062.91 -1150.26,-1830.31 -1100.26,-1780.31 -837.91,-1517.95 -837.91,-1129.32 -320.38,-611.8 U1.167@-320.38,-569.32
OUTB11: RA410_PortIOB.8 U1.166 | length 1849.9
  Top Layer w6: RA410_PortIOB.8@-1200.26,-2062.91 -1200.26,-1861.84 -1150.26,-1811.84 -849.91,-1511.49 -849.91,-1124.32 -340.07,-614.48 U1.166@-340.07,-569.32
OUTB12: RA411_PortIOB.5 U1.165 | length 1903.9
  Top Layer w6: RA411_PortIOB.5@-1350.26,-2062.91 -1350.26,-1843.78 -865.66,-1359.17 -865.66,-1123.07 -359.75,-617.17 U1.165@-359.75,-569.32
OUTB13: RA411_PortIOB.6 U1.164 | length 1916.4
  Top Layer w6: RA411_PortIOB.6@-1400.26,-2062.91 -1400.26,-1876.81 -1350.26,-1826.81 -885.34,-1361.88 -885.34,-1125.76 -379.44,-619.85 U1.164@-379.44,-569.32
OUTB14: RA411_PortIOB.7 U1.163 | length 1929
  Top Layer w6: RA411_PortIOB.7@-1450.26,-2062.91 -1450.26,-1909.83 -1400.26,-1859.83 -900.9,-1360.47 -900.9,-1116.38 -399.12,-614.6 U1.163@-399.12,-569.32
OUTB15: RA411_PortIOB.8 U1.162 | length 1941.5
  Top Layer w6: RA411_PortIOB.8@-1500.26,-2062.91 -1500.26,-1941.37 -1450.26,-1891.37 -912.9,-1354.01 -912.9,-1104.76 -418.81,-610.66 U1.162@-418.81,-569.32
OUTB16: R403_PortIOB.1 U1.161 | length 2001.2
  Top Layer w6: R403_PortIOB.1@-1605.5,-2087.1 -1605.5,-2029.64 -1500.26,-1924.4 -928.65,-1352.79 -928.65,-1096.88 -438.49,-606.72 U1.161@-438.49,-569.32
OUTC0: RA408_PortIOC.5 U1.24 | length 1408.4
  Top Layer w6: U1.24@571.35,-31.92 608.55,-31.92 647.86,-71.23 1077.2,-71.23 1671.24,-665.27 RA408_PortIOC.5@1671.24,-711.41
OUTC1: RA408_PortIOC.6 U1.23 | length 1467
  Top Layer w6: U1.23@571.35,-51.61 611.26,-51.6 642.89,-83.23 1072.23,-83.23 1567.22,-578.23 1567.22,-702.99 1625.64,-761.41 RA408_PortIOC.6@1671.24,-761.41
OUTC2: RA408_PortIOC.7 U1.22 | length 1502.5
  Top Layer w6: U1.22@571.35,-71.29 613.98,-71.29 637.92,-95.23 1067.26,-95.23 1555.22,-583.2 1555.22,-747.09 1619.54,-811.41 RA408_PortIOC.7@1671.24,-811.41
OUTC3: RA408_PortIOC.8 U1.21 | length 1537.4
  Top Layer w6: U1.21@571.35,-90.98 616.69,-90.97 632.95,-107.23 1062.29,-107.23 1543.22,-588.17 1543.22,-790.21 1614.42,-861.41 RA408_PortIOC.8@1671.24,-861.41
OUTC4: RA409_PortIOC.5 U1.20 | length 1717.3
  Top Layer w6: U1.20@571.35,-110.66 619.41,-110.66 627.98,-119.23 1057.32,-119.23 1269.56,-331.48 1269.56,-748.6 1532.38,-1011.41 RA409_PortIOC.5@1671.24,-1011.41
OUTC5: RA409_PortIOC.6 U1.18 | length 1737.3
  Top Layer w6: U1.18@571.35,-150.03 620.15,-150.03 638.95,-131.23 1052.35,-131.23 1257.56,-336.45 1257.56,-753.57 1565.4,-1061.41 RA409_PortIOC.6@1671.24,-1061.41
OUTC6: RA409_PortIOC.7 U1.17 | length 1757.1
  Top Layer w6: U1.17@571.35,-169.72 617.44,-169.71 643.92,-143.23 1047.37,-143.23 1050.71,-146.57 1245.56,-341.42 1245.56,-760.03 1596.94,-1111.41 RA409_PortIOC.7@1671.24,-1111.41
OUTC7: RA409_PortIOC.8 U1.16 | length 1776
  Top Layer w6: U1.16@571.35,-189.4 614.73,-189.4 648.89,-155.23 1042.41,-155.23 1233.56,-346.39 1233.56,-765 1629.97,-1161.41 RA409_PortIOC.8@1671.24,-1161.41
OUTC8: RA410_PortIOC.5 U1.15 | length 1967.7
  Top Layer w6: U1.15@571.35,-209.09 612.01,-209.08 653.86,-167.23 1037.44,-167.23 1172.73,-302.53 1172.73,-945.31 1538.83,-1311.41 RA410_PortIOC.5@1671.24,-1311.41
OUTC9: RA410_PortIOC.6 U1.11 | length 1610.1
  Top Layer w6: U1.11@571.35,-287.83 608.45,-287.83 656.86,-336.23 1160.73,-840.13 1160.73,-952.01 1570.13,-1361.41 RA410_PortIOC.6@1671.24,-1361.41
OUTC10: RA410_PortIOC.7 U1.10 | length 1623.1
  Top Layer w6: U1.10@571.35,-307.51 611.14,-307.51 651.86,-348.23 1148.73,-845.13 1148.73,-957.72 1602.41,-1411.41 RA410_PortIOC.7@1671.24,-1411.41
OUTC11: RA410_PortIOC.8 U1.9 | length 1636.1
  Top Layer w6: U1.9@571.35,-327.2 613.82,-327.2 1136.31,-849.68 1136.31,-963.02 1634.7,-1461.41 RA410_PortIOC.8@1671.24,-1461.41
OUTC12: RA411_PortIOC.5 U1.8 | length 1841.4
  Top Layer w6: U1.8@571.35,-346.88 616.51,-346.88 1124.31,-854.68 1124.31,-1226.38 1509.34,-1611.41 RA411_PortIOC.5@1671.24,-1611.41
OUTC13: RA411_PortIOC.6 U1.7 | length 1853.9
  Top Layer w6: U1.7@571.35,-366.57 619.19,-366.57 1112.31,-859.68 1112.31,-1231.35 1542.37,-1661.41 RA411_PortIOC.6@1671.24,-1661.41
OUTC14: RA411_PortIOC.7 U1.6 | length 1868.1
  Top Layer w6: U1.6@571.35,-386.25 621.88,-386.25 637.25,-401.62 ; 637.25,-401.65 1100.31,-864.71 1100.31,-1239.03 1572.69,-1711.41 RA411_PortIOC.7@1671.24,-1711.41
OUTC15: RA411_PortIOC.8 U1.5 | length 1881.1
  Top Layer w6: U1.5@571.35,-405.94 624.56,-405.94 1088.31,-869.68 1088.31,-1244.75 1604.97,-1761.41 RA411_PortIOC.8@1671.24,-1761.41
OUTC16: R403_PortIOC.1 U1.4 | length 1961.9
  Top Layer w6: U1.4@571.35,-425.62 627.28,-425.62 1076.31,-874.65 1076.31,-1263.27 1604.9,-1791.86 1604.9,-1828.27 1641.63,-1865 R403_PortIOC.1@1688.03,-1865
OUTD0: RA408_PortIOD.5 U1.74 | length 1202
  Top Layer w6: U1.74@73.32,603.91 73.32,653.69 87.89,668.27 87.89,969.35 319.74,1201.19 RA408_PortIOD.5@319.74,1703.8
OUTD1: RA408_PortIOD.6 U1.73 | length 1214.5
  Top Layer w6: U1.73@93,603.91 93,649.53 99.89,656.42 99.89,964.38 319.74,1184.22 369.74,1234.22 RA408_PortIOD.6@369.74,1703.8
OUTD2: RA408_PortIOD.7 U1.71 | length 1235.9
  Top Layer w6: U1.71@132.37,603.91 132.37,646.94 111.89,667.42 111.89,959.41 369.74,1217.25 419.74,1267.25 RA408_PortIOD.7@419.74,1703.8
OUTD3: RA408_PortIOD.8 U1.70 | length 1254.8
  Top Layer w6: U1.70@152.06,603.91 152.06,646.38 123.89,674.54 123.89,953.93 419.74,1249.77 469.74,1299.77 RA408_PortIOD.8@469.74,1703.8
OUTD4: RA409_PortIOD.5 U1.69 | length 1315.2
  Top Layer w6: U1.69@171.74,603.91 171.74,643.69 135.89,679.54 135.89,872.43 619.74,1356.27 RA409_PortIOD.5@619.74,1703.8
OUTD5: RA409_PortIOD.6 U1.68 | length 1334.1
  Top Layer w6: U1.68@191.43,603.91 191.43,641.01 147.89,684.54 147.89,867.46 619.74,1339.3 669.74,1389.3 RA409_PortIOD.6@669.74,1703.8
OUTD6: RA409_PortIOD.7 U1.64 | length 1286.1
  Top Layer w6: U1.64@270.17,603.91 270.17,641.01 318.58,689.42 318.58,1021.17 669.74,1372.33 719.74,1422.33 RA409_PortIOD.7@719.74,1703.8
OUTD7: RA409_PortIOD.8 U1.63 | length 1298.7
  Top Layer w6: U1.63@289.85,603.91 289.85,643.69 330.58,684.42 330.58,1016.2 719.74,1405.36 769.74,1455.36 RA409_PortIOD.8@769.74,1703.8
OUTD8: RA410_PortIOD.5 U1.62 | length 1501.9
  Top Layer w6: U1.62@309.54,603.91 309.54,646.38 344.58,681.42 344.58,891.68 476.47,1023.57 731.24,1023.57 919.74,1212.07 RA410_PortIOD.5@919.74,1703.8
OUTD9: RA410_PortIOD.6 U1.61 | length 1513.6
  Top Layer w6: U1.61@329.22,603.91 329.22,649.06 356.58,676.42 356.58,885.2 482.96,1011.57 736.21,1011.58 919.74,1195.1 969.74,1245.1 RA410_PortIOD.6@969.74,1703.8
OUTD10: RA410_PortIOD.7 U1.60 | length 1525.7
  Top Layer w6: U1.60@348.91,603.91 348.91,651.75 370.58,673.42 370.58,881.48 488.67,999.58 741.18,999.58 969.74,1228.13 1019.74,1278.13 RA410_PortIOD.7@1019.74,1703.8
OUTD11: RA410_PortIOD.8 U1.59 | length 1537.8
  Top Layer w6: U1.59@368.59,603.91 368.59,654.43 383.96,669.8 383.96,877.15 493.78,986.97 745.54,986.97 1069.74,1311.16 RA410_PortIOD.8@1069.74,1703.8
OUTD12: RA411_PortIOD.5 U1.58 | length 1591.3
  Top Layer w6: U1.58@388.28,603.91 388.28,657.12 395.96,664.8 395.96,871.43 499.5,974.97 750.51,974.97 1069.74,1294.19 1219.74,1444.19 RA411_PortIOD.5@1219.74,1703.8
OUTD13: RA411_PortIOD.6 U1.57 | length 1603.5
  Top Layer w6: U1.57@407.96,603.91 407.96,865.72 504.61,962.36 754.88,962.36 1269.74,1477.22 RA411_PortIOD.6@1269.74,1703.8
OUTD14: RA411_PortIOD.7 U1.56 | length 1621.9
  Top Layer w6: U1.56@427.65,603.91 427.65,656.4 419.96,664.09 419.96,860 510.33,950.36 759.85,950.36 1269.74,1460.25 1319.74,1510.25 RA411_PortIOD.7@1319.73,1703.8
OUTD15: RA411_PortIOD.8 U1.55 | length 1640.4
  Top Layer w6: U1.55@447.33,603.91 447.33,653.69 431.96,669.06 431.96,854.28 515.25,937.57 764.02,937.57 1369.74,1543.28 RA411_PortIOD.8@1369.74,1703.8
OUTD16: R403_PortIOD.1 U1.49 | length 1684.1
  Top Layer w6: U1.49@571.35,460.21 644.19,460.21 791.82,607.84 791.82,888.25 1475.5,1571.93 R403_PortIOD.1@1475.5,1727.1
PROGRAM: RA500.1 U1.106 U501.7 | length 2719
  Top Layer w6: -898.9,506.34 -869.08,476.52 -672,476.52 -648.95,499.58 U1.106@-601.88,499.58
  Top Layer w10: U501.7@-2413.65,1821.54 -2413.65,1720.97 -2398.51,1705.84 -2245.01,1705.84 -2230.25,1720.6 -2230.25,1794.4 -2197.35,1827.29 -2127.35,1827.29 -2094.46,1794.4 -2094.46,1643.84 -1941.94,1491.32 -1941.94,1406.7 -1837.15,1301.91 -1725.96,1301.91 -930.38,506.34 -898.9,506.34
PWR_IN: J600.1 S600.1 S600.2 | length 923.7
  Bottom Layer w50: S600.1@2484.74,2872.29 S600.2@2484.74,2772.29 2575.81,2772.29 2598.24,2749.86 2598.24,2648.51 2534.28,2584.55 2534.28,2499.92 2667.12,2367.08 2838.9,2367.08 J600.1@2884.74,2412.92
RS232_RX: R700.2 U1.75 | length 6883.3
  Top Layer w6: U1.75@53.63,603.91 53.63,650.98 75.89,673.24 75.89,979.2 174.17,1077.48 174.17,1110.94
  Top Layer w10: 174.17,1110.94 174.17,1705.27 240.1,1771.2 1415.98,1771.2 1422.86,1764.31 1577.35,1764.31 1692.48,1649.18 1692.48,1277.23 1730.86,1238.86 1730.86,-51.17 1724.95,-57.07 1724.95,-294.54 1723.97,-295.53 1723.97,-1806.14 1725.43,-1807.61 1725.43,-2057.72 1985.42,-2317.71 R700.2@2027.33,-2317.71
RS232_TX: U1.3 U700.13 | length 2963.7
  Top Layer w6: U1.3@571.35,-445.31 613.57,-445.31 968.54,-800.28 968.54,-1407.35
  Top Layer w10: 968.54,-1407.35 1969.46,-2408.27 2275.43,-2408.27 2305.76,-2438.6 U700.13@2305.76,-2486.65
RTS: J700.8 U700.8 | length 625.3
  Top Layer w10: U700.8@2305.76,-2228.77 2305.76,-2293.89 v1(2317.8,-2305.93)
  Bottom Layer w10: J700.8@2315.21,-2739.6 2266.29,-2690.68 2236.13,-2690.68 2205.62,-2660.17 2205.62,-2418.11 v1(2317.8,-2305.93)
RX: J700.3 U700.16 | length 146.4
  Top Layer w10: J700.3@2369.74,-2627.79 2369.74,-2571.83 2382.53,-2559.03 U700.16@2382.53,-2486.65
TCK: RA502.3 RA504.3 U1.207 U500.13 | length 6372.9
  Top Layer w6: U1.207@467.02,-569.32 467.02,-616.39 443.96,-639.45 443.96,-802.17 v1(499.5,-857.71)
  Top Layer w10: RA502.3@-2613.26,2337.29 -2554.26,2337.29 -2500.26,2391.28 -2450.26,2441.28 -2450.26,2503.19 -2436.38,2517.07 -2362.58,2517.07 v1(-2344.87,2499.36) ; U500.13@-2232.9,2117.29 v1(-2159.54,2117.29)
  Bottom Layer w8: v1(-2159.54,2117.29) -2121.17,2117.29 -2083.63,2079.76 -2083.63,1439.17 ; -1621.15,-280.86 -939.24,-962.77 467.88,-962.77 499.5,-931.15 v1(499.5,-857.71)
  Bottom Layer w10: v1(-2344.87,2499.36) -2344.87,2492.53 -2159.54,2307.2 v1(-2159.54,2117.29) ; -2083.63,1439.17 -1776.62,1132.16 -1776.62,-125.39 -1621.15,-280.86
TCK_HARD_A#: HDR501.3 RA504.6 | length 144.2
  Top Layer w10: RA504.6@-2450.26,2594.29 -2450.26,2655.8 -2435.26,2670.8 HDR501.3@-2435.26,2732.29
TCK_SOFT_A#: HDR501.7 RA505.6 | length 156.6
  Top Layer w10: HDR501.7@-2235.26,2732.29 -2190.26,2687.29 RA505.6@-2190.26,2594.29
TDI: U1.159 U500.9 | length 3826.3
  Top Layer w6: v1(-903.82,-716.77) -585.98,-716.77 -477.86,-608.65 U1.159@-477.86,-569.32
  Top Layer w10: U500.9@-2232.9,1917.29 -2008.74,1917.29 -1790.4,1698.95 -1790.4,1377.18 v1(-1790.84,1376.74)
  Bottom Layer w8: v1@-1790.89,1376.69 -1493.23,1079.03 -1493.23,-68.32 -938.26,-623.29 -938.26,-682.33 v1(-903.82,-716.77)
TDI_HARD_A#: HDR501.1 RA504.8 | length 144.2
  Top Layer w10: RA504.8@-2550.26,2594.29 -2550.26,2660.1 -2535.26,2675.1 HDR501.1@-2535.26,2732.29
TDI_PP: RA502.4 RA504.1 U500.3 U500.11 | length 1302.8
  Top Layer w10: v1(-2670.1,2461.55) -2670.1,2444.12 RA502.4@-2613.26,2387.29 -2580.02,2387.29 -2550.26,2417.05 RA504.1@-2550.26,2470.29 ; U500.3@-2437.63,2167.29 v1(-2361.08,2167.29) -2321.76,2127.97 -2321.76,2034.49 -2304.56,2017.29 U500.11@-2232.9,2017.29
  Bottom Layer w10: v1(-2670.1,2461.55) -2669.11,2460.56 -2669.11,2068.93 -2653.37,2053.19 -2475.18,2053.19 v1(-2361.08,2167.29)
TDI_SOFT_A#: HDR501.5 RA505.8 | length 156.6
  Top Layer w10: HDR501.5@-2335.26,2732.29 -2335.26,2686.61 -2290.26,2641.61 RA505.8@-2290.26,2594.29
TDO: RA504.2 U1.157 | length 4868.8
  Top Layer w6: v1(-852.65,-678.4) -585.98,-678.4 -517.23,-609.64 U1.157@-517.23,-569.32
  Top Layer w10: RA504.2@-2500.26,2470.29 -2500.26,2519.12 -2477.15,2542.24 -2010.82,2542.24 -1854.36,2385.78 v1(-1854.36,2128.96)
  Bottom Layer w8: v1(-1854.36,2128.96) -1970.47,2128.96 -2001.96,2097.47 -2001.96,2064.01 -2033.45,2032.52 -2033.45,1722.56 -1434.19,1123.31 -1434.19,-22.07 -852.65,-603.61 v1(-852.65,-678.4)
TDO_CFG: U500.10 U501.17 | length 717.5
  Top Layer w10: v1(-2336.52,1510.02) U501.17@-2336.52,1602.68 ; U500.10@-2232.9,1967.29 -2146.32,1967.29 v1(-2144.64,1965.61)
  Bottom Layer w10: v1(-2336.52,1510.02) -2337.5,1511 -2337.5,1772.75 v1(-2144.64,1965.61)
TDO_HARD_A#: HDR501.2 RA504.7 | length 265.9
  Top Layer w10: HDR501.2@-2535.26,2832.29 -2484.12,2781.15 -2484.12,2665.24 -2500.26,2649.09 RA504.7@-2500.26,2594.29
TDO_SOFT_A#: HDR501.6 RA505.7 | length 277.4
  Top Layer w10: HDR501.6@-2335.26,2832.29 -2285.35,2782.38 -2285.35,2700.66 -2240.26,2655.57 RA505.7@-2240.26,2594.29
TEST_BUTTON: R200.1 SW200.1 SW200.2 U1.132 | length 1250.7
  Top Layer w6: R200.1@-1262.86,-412.71 -1267.39,-408.18 SW200.1@-1267.39,-306.29 -1204.77,-306.29 -1153.75,-255.28 -1153.75,-187.38 -1017.92,-51.55 -678.39,-51.55 -639.08,-12.24 U1.132@-601.88,-12.24
  Top Layer w10: SW200.2@-1582.74,-306.29 SW200.1@-1267.39,-306.29
TMS: RA502.2 RA504.4 U1.2 U500.6 | length 7060
  Top Layer w6: U1.2@571.35,-464.99 609.64,-464.99 692.23,-547.58 v1(692.23,-643.96)
  Top Layer w10: RA502.2@-2613.26,2287.29 v1(-2535.29,2287.29) ; U500.6@-2437.63,2017.29 -2504.31,2017.29 -2535.29,2048.27 -2560.37,2073.35 -2560.37,2262.21 v1(-2535.29,2287.29) ; RA504.4@-2400.26,2470.29 -2400.26,2432.16 -2415.72,2416.7 -2435.48,2416.7 -2450.26,2401.92 -2489.04,2363.15 -2489.04,2333.54 v1(-2535.29,2287.29)
  Bottom Layer w8: -1655.19,-281.26 -1188.19,-748.26 -937.27,-999.18 581.04,-999.18 692.23,-887.99 v1(692.23,-643.96)
  Bottom Layer w10: v1(-2535.29,2287.29) -2414.34,2287.29 -2383.75,2317.88 -2322.74,2317.88 -2233.2,2228.34 -2233.2,2113.21 -2198.76,2078.77 -2123.98,2078.77 -2108.23,2063.03 -2108.23,1876.07 -2144.64,1839.66 -2144.64,1566.11 -2103.31,1524.78 -2103.31,1425.4 -1807.13,1129.21 -1807.13,-129.32 -1655.19,-281.26
TMS_HARD_A#: HDR501.4 RA504.5 | length 264.5
  Top Layer w10: HDR501.4@-2435.26,2832.29 -2385.72,2782.75 -2385.72,2676.06 -2400.26,2661.52 RA504.5@-2400.26,2594.29
TMS_SOFT_A#: HDR501.8 RA505.5 | length 277.4
  Top Layer w10: HDR501.8@-2235.26,2832.29 -2186.95,2783.98 -2186.95,2717.39 -2140.26,2670.7 RA505.5@-2140.26,2594.29
TX: J700.2 U700.17 | length 170.4
  Top Layer w10: U700.17@2408.12,-2486.65 2408.12,-2557.12 J700.2@2478.79,-2627.79